# EAGLE board clock-4digits (EAGLE 5.07)
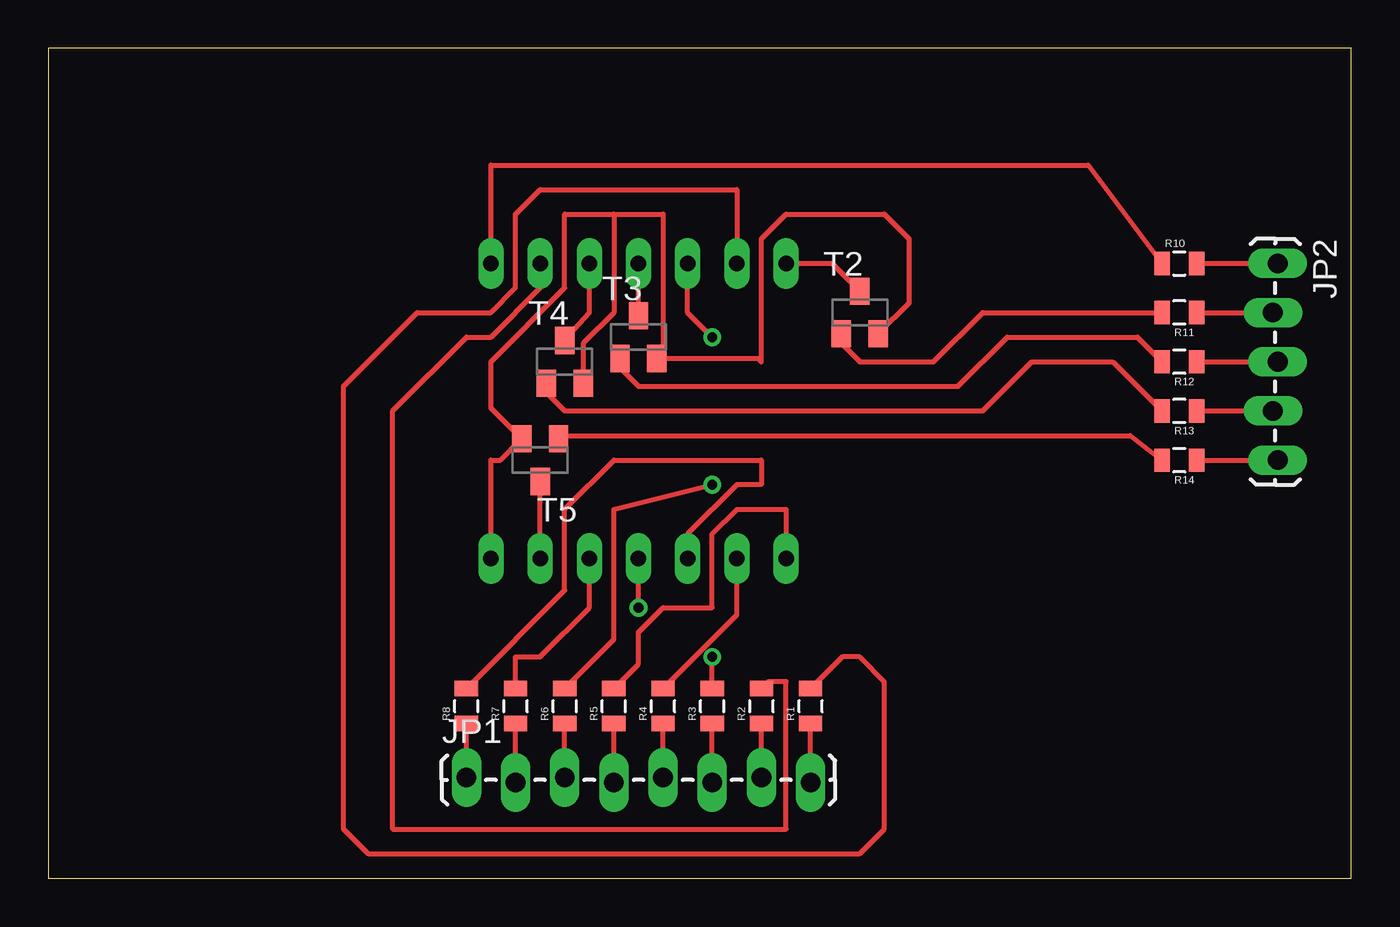
[diagram p0: board, top side]
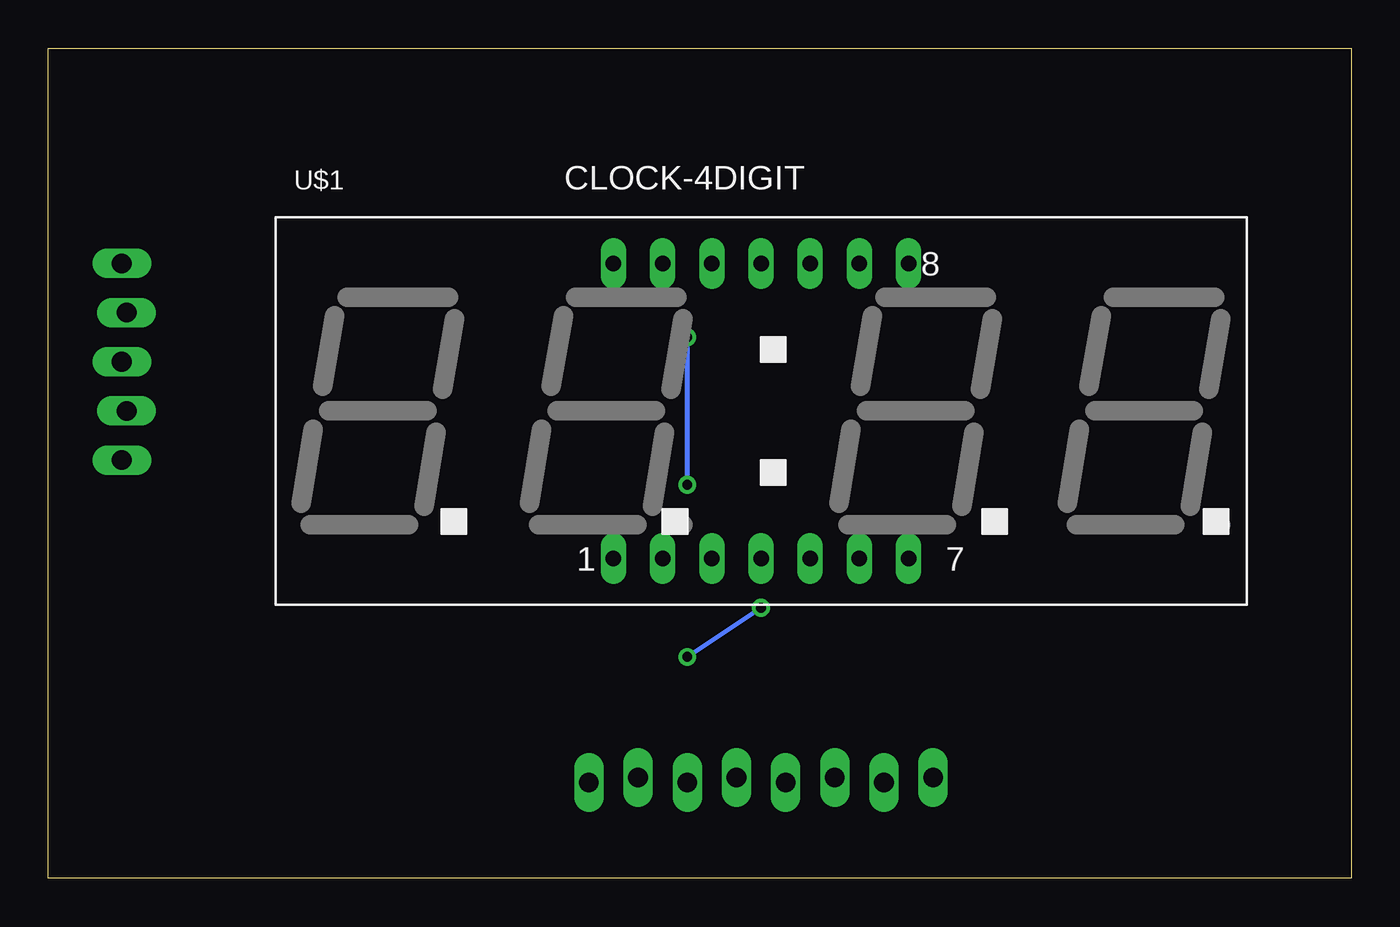
[diagram p1: board, bottom side, seen from below]

Size 67.29 x 42.85 mm. Coordinates in mm from the lower left corner, seen from the top.
Outline: 0,0 67.29,0 67.29,42.85 0,42.85 0,0
Copper layers (1*16): Top 0.035mm / dielectric 1.5mm / Bottom 0.035mm
Design rules "default": minimum track width 10mil, minimum drill 24mil, track to track 8mil, track to pad 8mil, pad to pad 8mil, via to via 8mil, smd to smd 8mil, copper to edge 40mil, drill to drill 8mil, minimum pad ring 10mil, minimum via ring 8mil, stop-mask expansion 4mil, vias tented up to drill 0mil, thermal gap 10mil

## Footprints (pad centres in the part's own frame; a part is rotated, then mirrored left to right if it is on the bottom)
1X08_LOCK_LONGPADS = drill 1.016 long: 1 0,0.127; 2 2.54,-0.127; 3 5.08,0.127; 4 7.62,-0.127; 5 10.16,0.127; 6 12.7,-0.127; 7 15.24,0.127; 8 17.78,-0.127
1X05_LOCK_LONGPADS = drill 1.016 long: 1 0,0; 2 2.54,-0.254; 3 5.08,0; 4 7.62,-0.254; 5 10.16,0
0805 = smd 0.8 x 1.2: 1 -0.9,0; 2 0.9,0
SOT23-BEC = smd 1 x 1.4: B -0.95,-1.1; C 0,1.1; E 0.95,-1.1
LG5643FH-50MMX20MM = drill 0.8 long: 1 -7.62,-7.62; 2 -5.08,-7.62; 3 -2.54,-7.62; 4 0,-7.62; 5 2.54,-7.62; 6 5.08,-7.62; 7 7.62,-7.62; 8 7.62,7.62; 9 5.08,7.62; 10 2.54,7.62; 11 0,7.62; 12 -2.54,7.62; 13 -5.08,7.62; 14 -7.62,7.62

## Placement (x,y rotation side)
JP1  [1X08_LOCK_LONGPADS]  21.59,5.08 0 top
JP2  [1X05_LOCK_LONGPADS]  63.5,31.75 270 top
R1  [0805]  39.37,8.89 90 top
R2  [0805]  36.83,8.89 90 top
R3  [0805]  34.29,8.89 90 top
R4  [0805]  31.75,8.89 90 top
R5  [0805]  29.21,8.89 90 top
R6  [0805]  26.67,8.89 90 top
R7  [0805]  24.13,8.89 90 top
R8  [0805]  21.59,8.89 90 top
R10  [0805]  58.42,31.75 0 top
R11  [0805]  58.42,29.21 180 top
R12  [0805]  58.42,26.67 180 top
R13  [0805]  58.42,24.13 180 top
R14  [0805]  58.42,21.59 180 top
T2  [SOT23-BEC]  41.91,29.21 0 top
T3  [SOT23-BEC]  30.48,27.94 0 top
T4  [SOT23-BEC]  26.67,26.67 0 top
T5  [SOT23-BEC]  25.4,21.59 180 top
U$1  CLOCK-4DIGIT  [LG5643FH-50MMX20MM]  30.48,24.13 0 bottom

## Library data of the parts
JP1 JP2 = SparkFun
R1-R8 R10-R14 T2-T5 = digital-toy
U$1 = led-seg

## Nets
N$1: R1.2 U$1.13
N$2: R2.2 U$1.9
N$3: R3.2 U$1.4
N$4: R4.2 U$1.2
N$5: R5.2 U$1.1
N$6: R6.2 U$1.12
N$7: R7.2 U$1.5
N$8: R8.2 U$1.3
N$9: R10.1 U$1.8
N$11: T2.C U$1.14
N$12: T3.C U$1.11
N$13: T4.C U$1.10
N$14: T5.C U$1.6
N$15: R11.2 T2.B
N$16: R14.2 T5.B
N$17: R13.2 T4.B
N$18: R12.2 T3.B
N$21: JP2.1 R10.2
N$22: JP2.2 R11.1
N$23: JP2.3 R12.1
N$24: JP2.4 R13.1
N$25: JP2.5 R14.1
N$26: JP1.8 R1.1
N$27: JP1.7 R2.1
N$28: JP1.6 R3.1
N$29: JP1.5 R4.1
N$30: JP1.4 R5.1
N$31: JP1.3 R6.1
N$32: JP1.2 R7.1
N$33: JP1.1 R8.1
VCC: T2.E T3.E T4.E T5.E U$1.7

## Tracks (layer width: path | path; a pad name or v marks a point on that pad's centre or on a via)
N$1
  Top 0.254: R1.2 41.01,11.43 41.91,11.43 43.18,10.16 43.18,2.54 41.91,1.27 16.51,1.27 15.24,2.54 15.24,25.4 19.05,29.21 22.86,29.21 24.13,30.48 24.13,34.29 25.4,35.56 35.56,35.56 U$1.13
N$2
  Top 0.254: R2.2 37.2,10.16 38.1,10.16 38.1,2.54 17.78,2.54 17.78,24.13 21.59,27.94 22.86,27.94 25.4,30.48 U$1.9
N$3  (via drill 0.51)
  Top 0.254: R3.2 v34.29,11.43 | v30.48,13.97 U$1.4
  Bottom 0.254: v34.29,11.43 v30.48,13.97
N$4
  Top 0.254: R4.2 35.56,13.6 U$1.2
N$5
  Top 0.254: R5.2 30.48,11.06 30.48,12.7 31.75,13.97 34.29,13.97 34.29,17.78 35.56,19.05 38.1,19.05 U$1.1
N$6  (via drill 0.51)
  Top 0.254: R6.2 29.21,12.33 29.21,19.05 v34.29,20.32 | v34.29,27.94 33.02,29.21 U$1.12
  Bottom 0.254: v34.29,20.32 v34.29,27.94
N$7
  Top 0.254: U$1.5 27.94,13.97 25.4,11.43 24.13,11.43 R7.2
N$8
  Top 0.254: R8.2 26.67,14.87 26.67,19.05 29.21,21.59 36.83,21.59 36.83,20.32 35.56,20.32 33.02,17.78 U$1.3
N$9
  Top 0.254: R10.1 53.71,36.83 22.86,36.83 U$1.8
N$11
  Top 0.254: T2.C 40.47,31.75 U$1.14
N$12
  Top 0.254: T3.C U$1.11
N$13
  Top 0.254: U$1.10 27.94,29.21 T4.C
N$14
  Top 0.254: U$1.6 T5.C
N$15
  Top 0.254: R11.2 48.26,29.21 45.72,26.67 41.91,26.67 40.96,27.62 T2.B
N$16
  Top 0.254: R14.2 55.88,22.86 26.52,22.86 T5.B
N$17
  Top 0.254: R13.2 54.98,26.67 50.8,26.67 48.26,24.13 26.67,24.13 25.72,25.08 T4.B
N$18
  Top 0.254: R12.2 56.25,27.94 49.53,27.94 46.99,25.4 30.48,25.4 29.53,26.35 T3.B
N$21
  Top 0.254: R10.2 JP2.1
N$22
  Top 0.254: R11.1 JP2.2
N$23
  Top 0.254: R12.1 JP2.3
N$24
  Top 0.254: R13.1 JP2.4
N$25
  Top 0.254: R14.1 JP2.5
N$26
  Top 0.254: JP1.8 R1.1
N$27
  Top 0.254: JP1.7 R2.1
N$28
  Top 0.254: JP1.6 R3.1
N$29
  Top 0.254: JP1.5 R4.1
N$30
  Top 0.254: JP1.4 R5.1
N$31
  Top 0.254: JP1.3 R6.1
N$32
  Top 0.254: JP1.2 R7.1
N$33
  Top 0.254: JP1.1 R8.1
VCC
  Top 0.254: U$1.7 22.86,21.59 23.35,21.59 T5.E 22.86,24.28 22.86,26.67 26.67,30.48 26.67,34.29 29.21,34.29 | 29.21,34.29 29.21,29.21 27.62,27.62 T4.E | T2.E 44.45,29.7 44.45,33.02 43.18,34.29 38.1,34.29 36.83,33.02 36.83,26.67 36.66,26.84 T3.E 31.75,27.16 31.75,34.29 29.21,34.29